# Altium PCB pci-reles.PcbDoc
Units mm, origin at the board's own origin, x right, y up, seen from the top; angles counter-clockwise.
Board outline 92.3 x 121.3 mm, 2 copper layers (Top Layer, Bottom Layer); 81 components, 54 nets, 207 pads, 0 vias.
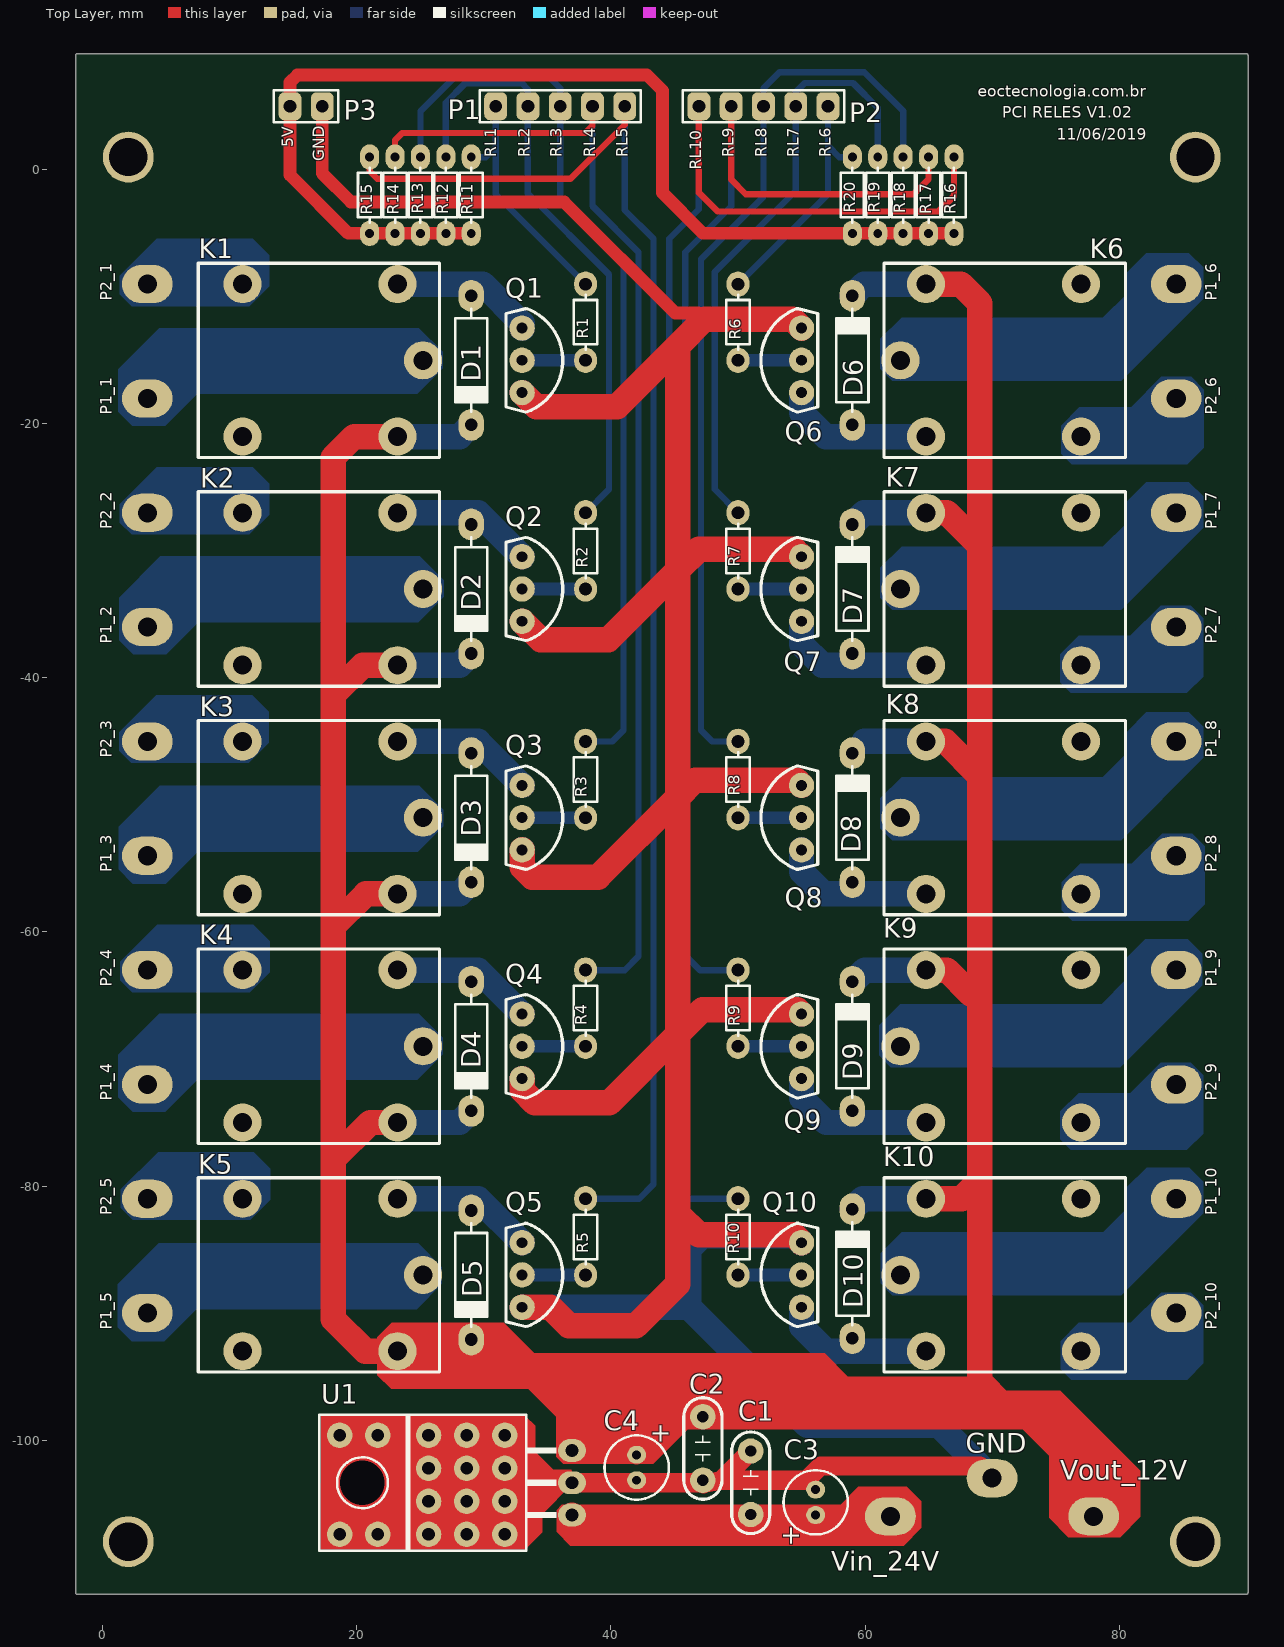
[diagram p0: Top Layer view]
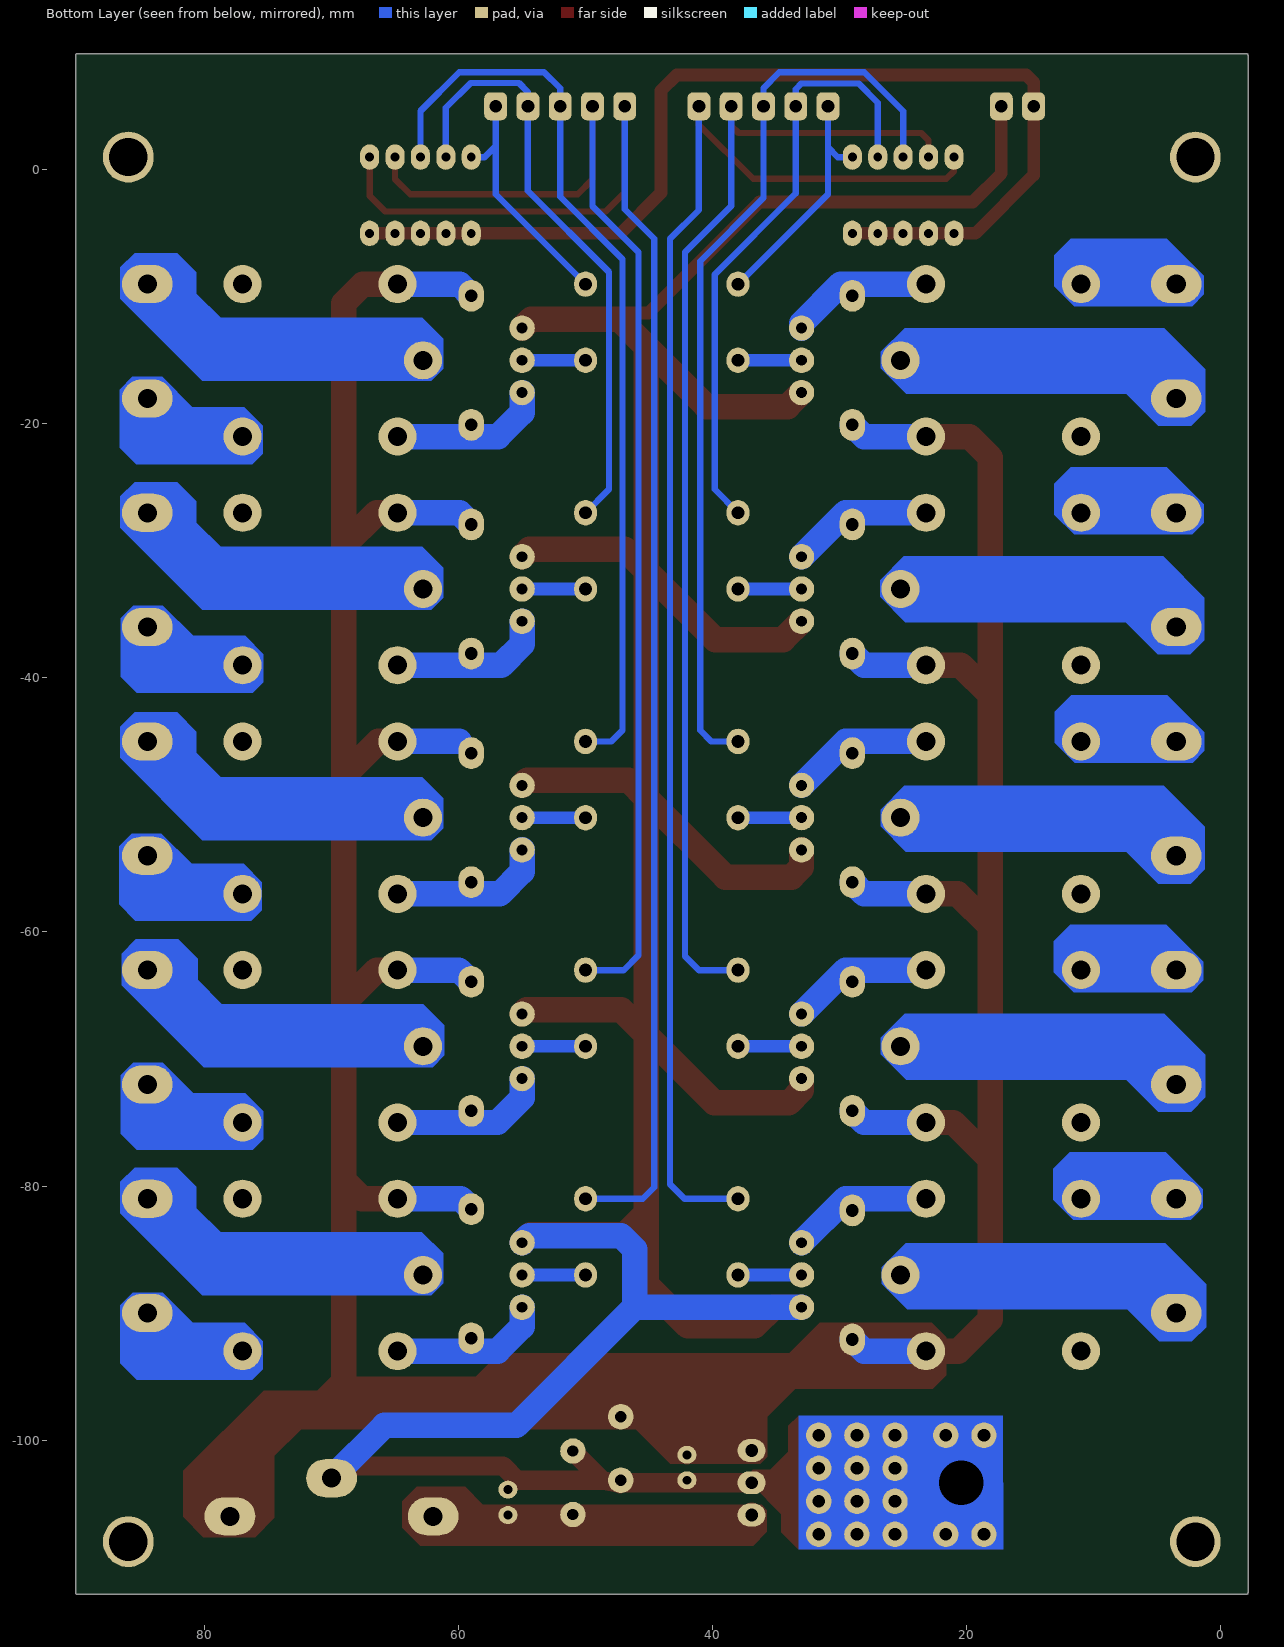
[diagram p1: Bottom Layer view, seen from below]
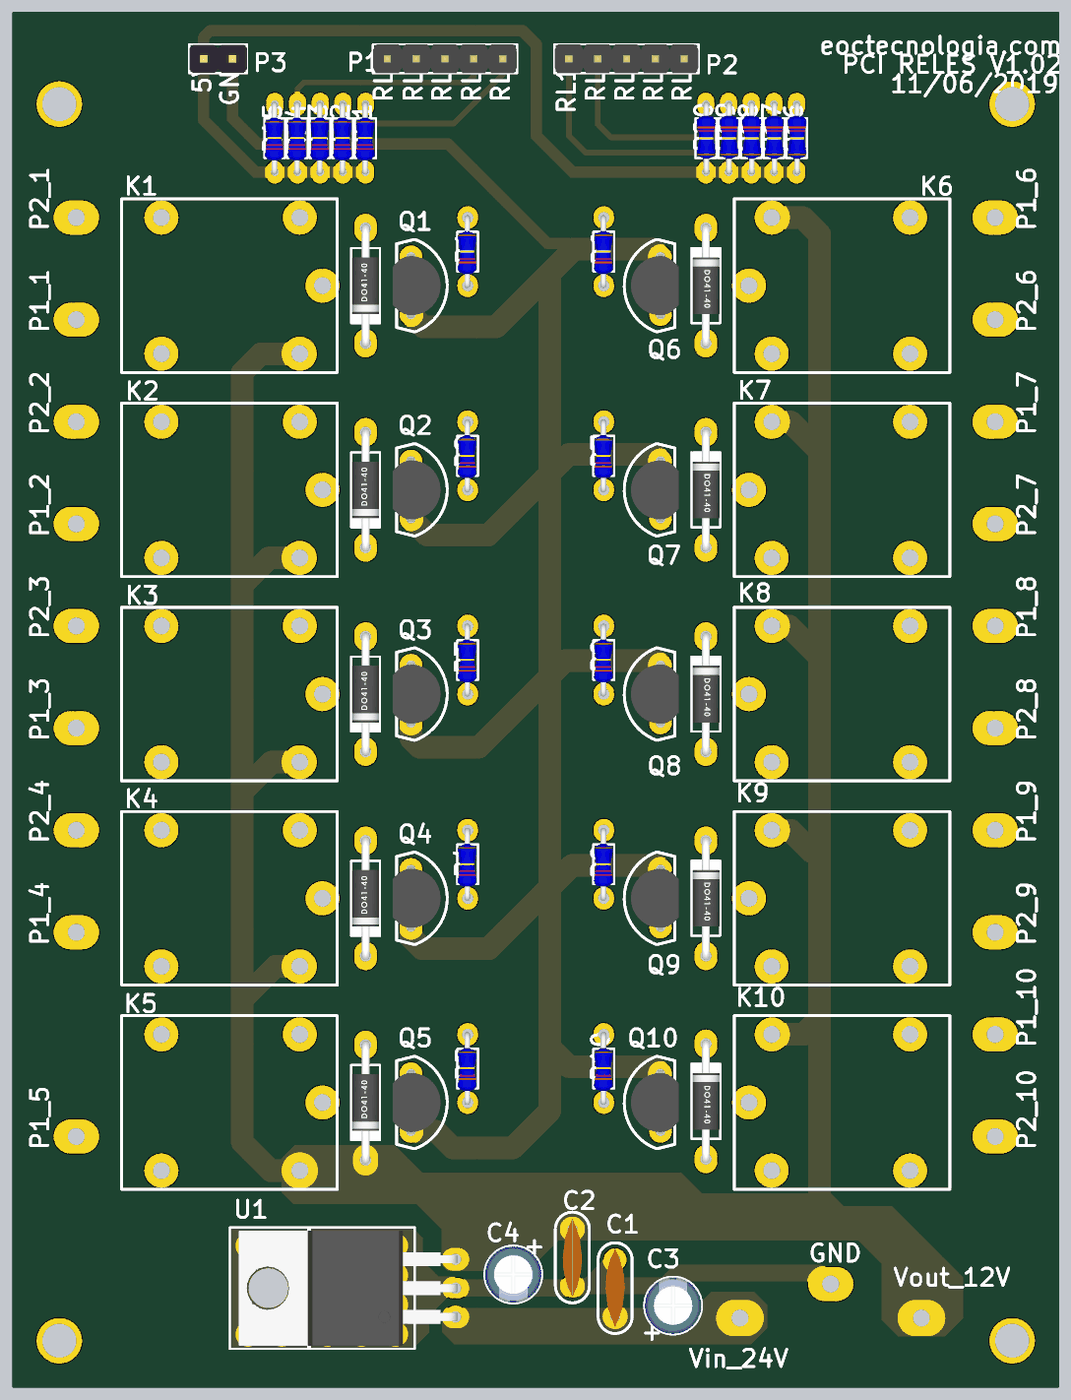
[diagram p2: 3D render of the assembled board from above, using the file's embedded part models]

## Layer stack, top to bottom
Top Solder: solder mask 0.0102, Solder Resist, Dk 3.5
Top Layer: signal copper 0.0356
Dielectric 1: dielectric 0.32, FR-4, Dk 4.8
Bottom Layer: signal copper 0.0356
Bottom Solder: solder mask 0.0102, Solder Resist, Dk 3.5

## Board outline
-2.15,-112 ccw(c-2,-112) -2,-112.15 90,-112.15 ccw(c90,-112) 90.15,-112 90.15,9 ccw(c90,9) 89.91,9.12 ccw(c89.82,9) 89.82,9.15 -2,9.15 ccw(c-2,9) -2.15,9

## Design rules (kind name [scope] priority, off if disabled: settings)
Clearance [All] p1: gap=0.254 ignorepadtopadclearanceinfootprint=FALSE except(0: Arc-Hole Track-Hole SMDPad-Hole THPad-Hole Via-Hole Fill-Hole Poly-Hole Region-Hole Text-Hole)
PolygonConnect [All] p1: connectstyle=Relief reliefconductorwidth=0.254 reliefentries=4 polygonreliefangle="90 Angle" airgapwidth=0.254
RoomDefinition placa_rele [InComponentClass('placa_rele')] p1: confinementstyle=ConfineIn formatcopy=TRUE lockcomponents=FALSE outline -1.99,9.04 -2.04,8.988 -2.04,-112.05 -2,-112.009 89.98,-112.009 89.98,8.988
RoutingVias [All] p1: holewidth=0.711 width=1.27 viastyle="Through Hole" minholewidth=0.711 minwidth=1.27 maxholewidth=0.711 maxwidth=1.27
SolderMaskExpansion [All] p1: expansion=0.102
Width [All] p1: maxlimit=3 minlimit=0.3 preferedwidth=1 minimp=50.000000 maximp=50.000000 favimp=50.000000
30 further rules are at their usual default settings.

## Components (designator, comment, footprint, x,y, rotation, side; value= is the part's Value field where it differs from the comment)
C1 "100nF 50V" "CAP CER 6 x 3 x 5" 51,-103.36 r270 top
C2 "100nF 50V" "CAP CER 6 x 3 x 5" 47.23,-100.66 r90 top
C3 "100uF 16V" "CAP ELE 5 x 11 x 2" 56.11,-104.9 r90 top
C4 "10uF 50V" "CAP ELE 5 x 11 x 2" 42.02,-102.16 r270 top
D1 "1N4007" DO-41 29,-15 r270 top
D2 "1N4007" DO-41 29,-33 r270 top
D3 "1N4007" DO-41 29,-51 r270 top
D4 "1N4007" DO-41 29,-69 r270 top
D5 "1N4007" DO-41 29,-87 r270 top
D6 "1N4007" DO-41 59,-15 r90 top
D7 "1N4007" DO-41 59,-33 r90 top
D8 "1N4007" DO-41 59,-51 r90 top
D9 "1N4007" DO-41 59,-69 r90 top
D10 "1N4007" DO-41 59,-86.9 r90 top
GND "PAD 1.5x3mm" "PAD 1.5x3mm"#1 70.58,-103.88 r0 top
K1 "AZ1RC2" "RELE SPDT" 17,-15 r180 top
K2 "AZ1RC2" "RELE SPDT" 17,-33 r180 top
K3 "AZ1RC2" "RELE SPDT" 17,-51 r180 top
K4 "AZ1RC2" "RELE SPDT" 17,-69 r180 top
K5 "AZ1RC2" "RELE SPDT" 17,-87 r180 top
K6 "AZ1RC2" "RELE SPDT" 71,-15 r0 top
K7 "AZ1RC2" "RELE SPDT" 71,-33 r0 top
K8 "AZ1RC2" "RELE SPDT" 71,-51 r0 top
K9 "AZ1RC2" "RELE SPDT" 71,-69 r0 top
K10 "AZ1RC2" "RELE SPDT" 71,-87 r0 top
P1 "Barra de Pinos RL" "HEADER 5X2.54MM" 36,5 r0 top
P1_1 "PAD 1.5x3mm" "PAD 1.5x3mm"#2 3.9,-18.23 r90 top
P1_2 "PAD 1.5x3mm" "PAD 1.5x3mm"#3 2.98,-33.8 r0 top
P1_3 "PAD 1.5x3mm" "PAD 1.5x3mm"#4 2.54,-50.63 r0 top
P1_4 "PAD 1.5x3mm" "PAD 1.5x3mm"#5 2.26,-69.61 r0 top
P1_5 "PAD 1.5x3mm" "PAD 1.5x3mm"#6 2.4,-88.31 r0 top
P1_6 "PAD 1.5x3mm" "PAD 1.5x3mm"#7 84.51,-14.39 r0 top
P1_7 "PAD 1.5x3mm" "PAD 1.5x3mm"#8 84.51,-32.65 r0 top
P1_8 "PAD 1.5x3mm" "PAD 1.5x3mm"#9 83.36,-50.63 r0 top
P1_9 "PAD 1.5x3mm" "PAD 1.5x3mm"#10 84.8,-68.6 r0 top
P1_10 "PAD 1.5x3mm" "PAD 1.5x3mm"#11 84.08,-86.87 r90 top
P2 "Barra de Pinos RL" "HEADER 5X2.54MM" 52,5 r0 top
P2_1 "PAD 1.5x3mm" "PAD 1.5x3mm"#12 3.66,-9.02 r0 top
P2_2 "PAD 1.5x3mm" "PAD 1.5x3mm"#13 1.97,-26.75 r90 top
P2_3 "PAD 1.5x3mm" "PAD 1.5x3mm"#14 -4.07,-46.74 r90 top
P2_4 "PAD 1.5x3mm" "PAD 1.5x3mm"#15 -4.5,-63.86 r90 top
P2_5 "PAD 1.5x3mm" "PAD 1.5x3mm"#16 -7.67,-81.69 r90 top
P2_6 "PAD 1.5x3mm" "PAD 1.5x3mm"#17 84.51,-21.15 r90 top
P2_7 "PAD 1.5x3mm" "PAD 1.5x3mm"#18 84.08,-38.83 r90 top
P2_8 "PAD 1.5x3mm" "PAD 1.5x3mm"#19 83.65,-56.96 r90 top
P2_9 "PAD 1.5x3mm" "PAD 1.5x3mm"#20 84.8,-75.51 r90 top
P2_10 "PAD 1.5x3mm" "PAD 1.5x3mm"#21 85.23,-93.63 r90 top
P3 "Barra de Pinos VCC/GND" "HEADER 2X2.54MM" 16,5 r180 top
Q1 "BC337" TO-92A 33,-15 r90 top
Q2 "BC337" TO-92A 33,-33 r90 top
Q3 "BC337" TO-92A 33,-51 r90 top
Q4 "BC337" TO-92A 33,-69 r90 top
Q5 "BC337" TO-92A 33,-87 r90 top
Q6 "BC337" TO-92A 55,-15 r270 top
Q7 "BC337" TO-92A 55,-33 r270 top
Q8 "BC337" TO-92A 55,-51 r270 top
Q9 "BC337" TO-92A 55,-69 r270 top
Q10 "BC337" TO-92A 55,-87 r270 top
R1 "2k2 1/8W" "RES CR16"#1 38,-12 r270 top
R2 "2k2 1/8W" "RES CR16"#1 38,-30 r270 top
R3 "2k2 1/8W" "RES CR16"#1 38,-48 r270 top
R4 "2k2 1/8W" "RES CR16"#1 38,-66 r270 top
R5 "2k2 1/8W" "RES CR16"#1 38,-84 r270 top
R6 "2k2 1/8W" "RES CR16"#1 50,-12 r270 top
R7 "2k2 1/8W" "RES CR16"#1 50,-30 r270 top
R8 "2k2 1/8W" "RES CR16"#1 50,-48 r270 top
R9 "2k2 1/8W" "RES CR16"#1 50,-66 r270 top
R10 "2k2 1/8W" "RES CR16"#1 50,-84 r270 top
R11 "10k 1/8W 1%" "RES CR16"#2 29,-2 r270 top
R12 "10k 1/8W 1%" "RES CR16"#2 27,-2 r270 top
R13 "10k 1/8W 1%" "RES CR16"#2 25,-2 r270 top
R14 "10k 1/8W 1%" "RES CR16"#2 23,-2 r270 top
R15 "10k 1/8W 1%" "RES CR16"#2 21,-2 r270 top
R16 "10k 1/8W 1%" "RES CR16"#2 67,-2 r90 top
R17 "10k 1/8W 1%" "RES CR16"#2 65,-2 r90 top
R18 "10k 1/8W 1%" "RES CR16"#2 63,-2 r90 top
R19 "10k 1/8W 1%" "RES CR16"#2 61,-2 r90 top
R20 "10k 1/8W 1%" "RES CR16"#2 59,-2 r90 top
U1 "LM7812CT" TO220_90 26.98,-103.36 r0 top
Vin_24V "PAD 1.5x3mm" "PAD 1.5x3mm"#22 62.84,-106.34 r90 top
Vout_12V "PAD 1.5x3mm" "PAD 1.5x3mm"#23 78.72,-106.27 r90 top

## Footprints (in the part's own frame and the unit in brackets; to place one, negate y for a bottom-side part, rotate by r counter-clockwise, add the part's x,y. Pads: shape width x height; smd on the part's side, far side on the other; paste and mask are expansions set on the pad)
"CAP CER 6 x 3 x 5" [mm]
  round 2 hole 0.9: 1(-2.5,0) 2(2.5,0)
  silkscreen extent -4,-1.5 4,1.5, body extent -3.5,-0.85 3.49,0.85, height 7.5
"CAP ELE 5 x 11 x 2" [mm] "Capacitor 5mm diâmetro x 11mm de altura x 2mm entre pinos"
  oval 1.4x1.5 hole 0.7: 1(-1,0) 2(1,0)
  silkscreen extent -2.53,-2.53 2.53,2.53, body extent -2.5,-2.5 2.5,2.5, height 11
DO-41 [mm]
  oval 2.5x2 hole 1: 1(-5.08,0) 2(5.08,0)
  silkscreen extent -4.06,-1.27 4.06,1.27, body extent -5.43,-1.2 5.43,1.2, height 2.53
"HEADER 2X2.54MM" [mm] "Barra de pinos, 2 pinos, espaçamento 2.54mm, Body 7.62x2.54mm"
  rrect50% 1.8x2.2 hole 1: 1(-1.27,0) 2(1.27,0)
  silkscreen extent -2.54,-1.27 2.54,1.27, body extent -2.54,-1.24 2.54,1.24, height 8.54
"HEADER 5X2.54MM" [mm] "Barra de pinos, 5 pinos, espaçamento 2.54mm, Body 12.95x2.54mm"
  rrect50% 1.8x2.2 hole 1: 1(-5.08,0) 2(-2.54,0) 3(0,0) 4(2.54,0) 5(5.08,0)
  silkscreen extent -6.35,-1.27 6.35,1.27, body extent -6.35,-1.27 6.35,1.27, height 8.54
"PAD 1.5x3mm"#1 [mm]
  oval 4x3 hole 1.5: 1(-0.58,0.88)
"PAD 1.5x3mm"#2 [mm]
  oval 3x4 hole 1.5: 1(0.23,0.4)
"PAD 1.5x3mm"#3 [mm]
  oval 4x3 hole 1.5: 1(0.52,-2.2)
"PAD 1.5x3mm"#4 [mm]
  oval 4x3 hole 1.5: 1(0.96,-3.37)
"PAD 1.5x3mm"#5 [mm]
  oval 4x3 hole 1.5: 1(1.24,-2.39)
"PAD 1.5x3mm"#6 [mm]
  oval 4x3 hole 1.5: 1(1.1,-1.69)
"PAD 1.5x3mm"#7 [mm]
  oval 4x3 hole 1.5: 1(-0.01,5.39)
"PAD 1.5x3mm"#8 [mm]
  oval 4x3 hole 1.5: 1(-0.01,5.65)
"PAD 1.5x3mm"#9 [mm]
  oval 4x3 hole 1.5: 1(1.14,5.63)
"PAD 1.5x3mm"#10 [mm]
  oval 4x3 hole 1.5: 1(-0.3,5.6)
"PAD 1.5x3mm"#11 [mm]
  oval 3x4 hole 1.5: 1(5.87,-0.42)
"PAD 1.5x3mm"#12 [mm]
  oval 4x3 hole 1.5: 1(-0.16,0.02)
"PAD 1.5x3mm"#13 [mm]
  oval 3x4 hole 1.5: 1(-0.25,-1.53)
"PAD 1.5x3mm"#14 [mm]
  oval 3x4 hole 1.5: 1(1.74,-7.57)
"PAD 1.5x3mm"#15 [mm]
  oval 3x4 hole 1.5: 1(0.86,-8)
"PAD 1.5x3mm"#16 [mm]
  oval 3x4 hole 1.5: 1(0.69,-11.17)
"PAD 1.5x3mm"#17 [mm]
  oval 3x4 hole 1.5: 1(3.15,0.01)
"PAD 1.5x3mm"#18 [mm]
  oval 3x4 hole 1.5: 1(2.83,-0.42)
"PAD 1.5x3mm"#19 [mm]
  oval 3x4 hole 1.5: 1(2.96,-0.85)
"PAD 1.5x3mm"#20 [mm]
  oval 3x4 hole 1.5: 1(3.51,0.3)
"PAD 1.5x3mm"#21 [mm]
  oval 3x4 hole 1.5: 1(3.63,0.73)
"PAD 1.5x3mm"#22 [mm]
  oval 3x4 hole 1.5: 1(0.34,0.84)
"PAD 1.5x3mm"#23 [mm]
  oval 3x4 hole 1.5: 1(0.27,0.72)
"RELE SPDT" [mm]
  round 3 hole 1.5: 1(-8.2,0) 2(6,-6) 3(6,6) 4(-6.2,6) 5(-6.2,-6)
  silkscreen extent -9.5,-7.65 9.5,7.65, body extent -9.4,-7.49 9.4,7.51, height 15.4
"RES CR16"#1 [mm]
  oval 2x1.8 hole 1: 1(-3,0) 2(3,0)
  silkscreen extent -2.15,-0.91 2.15,0.91, body extent -3.2,-0.89 3.2,0.81, height 1.71
"RES CR16"#2 [mm]
  oval 2x1.5 hole 0.7: 1(-3,0) 2(3,0)
  silkscreen extent -2.15,-0.91 2.15,0.91, body extent -3.2,-0.89 3.2,0.81, height 1.71
TO220_90 [mm]
  round 0 hole 3.5: 0(-6.55,0)
  oval 2.2x1.8 hole 1: 1(9.95,-2.54) 2(9.95,0) 3(9.95,2.54)
  silkscreen extent -9.95,-5.35 8.71,5.35, body extent -9.17,-5.08 10.11,5.08, height 4.45
TO-92A [mm]
  round 2 hole 0.85: 1(2.54,0) 2(0,0) 3(-2.54,0)
  silkscreen extent -4.06,-3.19 4.06,1.27, body extent -2.79,-2.61 2.79,1.59, height 8

## Part data
C1 C2: library part "Cap Cerâmico 100nF 50V", "CAP CER 0.1UF 50V Y5V RADIAL", Manufacturer="AVX Corporation", Manufacturer Part Number=5ZH104ZOCAM, Operating Temperature="-30°C ~ 85°C", Package / Case="Radial, Disc", Ratings=-, Supplier Part Number 1=478-4279-1-ND, Temperature Coefficient="Y5V (F)", Tolerance="-20%, +80%", Voltage - Rated=50V, Applications="General Purpose", Category=Capacitors, ComponentLink1Description=http://media.digikey.com/pdf/Data%20Sheets/AVX%20PDFs/Disc_Ceram_Cap_Class_III.pdf, ComponentLink1URL=http://media.digikey.com/pdf/Data%20Sheets/AVX%20PDFs/Disc_Ceram_Cap_Class_III.pdf, Código=50, Features=-, Height - Seated (Max)="0.118\" (3.00mm)", Lead Spacing="0.197\" (5.00mm)", Lead Style="Formed Leads - Kinked", Montagem=PTH, Mounting Type="Through Hole", Packaging="Cut Tape (CT)", Part Status=Obsolete, Pricing 1="1=0 (USD)", RoHS="RoHS Compliant", Size / Dimension="0.236\" Dia (6.00mm)", Stock 1=0, Supplier 1=Digi-Key, Thickness (Max)=-
C3: library part "Cap Eletrolitico 100uF/16V", "CAP ALUM 100UF 20% 16V RADIAL", ESR (Equivalent Series Resistance)=-, Lifetime @ Temp.="2000 Hrs @ 85°C", Manufacturer=Nichicon, Manufacturer Part Number=UFW1C101MDD1TD, Operating Temperature="-40°C ~ 85°C", Package / Case="Radial, Can", Ripple Current - High Frequency="232.5mA @ 10kHz", Ripple Current - Low Frequency="155mA @ 120Hz", Supplier Part Number 1=493-10975-1-ND, Tolerance=±20%, Applications=Audio, Category=Capacitors, ComponentLink1Description=http://nichicon-us.com/english/products/pdfs/e-ufw.pdf, ComponentLink1URL=http://nichicon-us.com/english/products/pdfs/e-ufw.pdf, Código=1311, Height - Seated (Max)="0.492\" (12.50mm)", Lead Spacing="0.079\" (2.00mm)", Montagem=PTH, Mounting Type="Through Hole", Packaging="Cut Tape (CT)", Part Status=Active, Polarization=Polar, Pricing 1="1=0.23, 10=0.159, 100=0.0903, 500=0.06376, 1000=0.05579 (USD)", RoHS="RoHS Compliant", Size / Dimension="0.197\" Dia (5.00mm)", Stock 1=17383, Supplier 1=Digi-Key, Surface Mount Land Size=-
C4: library part "Cap Eletrolitico 10uF 400V", "CAP ALUM 10UF 20% 400V RADIAL", ESR (Equivalent Series Resistance)=-, Lifetime @ Temp.="1000 Hrs @ 105°C", Manufacturer=Nichicon, Manufacturer Part Number=UVY2G100MPD, Operating Temperature="-40°C ~ 105°C", Package / Case="Radial, Can", Ripple Current - High Frequency="102.4mA @ 10kHz", Ripple Current - Low Frequency="64mA @ 120Hz", Supplier Part Number 1=493-13411-ND, Tolerance=±20%, Applications="General Purpose", Category=Capacitors, ComponentLink1Description=http://nichicon-us.com/english/products/pdfs/e-uvy.pdf, ComponentLink1URL=http://nichicon-us.com/english/products/pdfs/e-uvy.pdf, Height - Seated (Max)="0.689\" (17.50mm)", Lead Spacing="0.197\" (5.00mm)", Montagem=PTH, Mounting Type="Through Hole", Packaging=Bulk, Part Status=Active, Polarization=Polar, Pricing 1="1=0.65, 10=0.462, 100=0.3045, 500=0.22554, 1000=0.19171, 2500=0.18043, 5000=0.16916 (USD)", RoHS="RoHS Compliant", Size / Dimension="0.394\" Dia (10.00mm)", Stock 1=12533, Supplier 1=Digi-Key, Surface Mount Land Size=-
D1 D2 D3 D4 D5 D6 D7 D8 D9 D10: library part "Diodo 1N4007", "DIODE GEN PURP 1KV 1A DO41", Base Part Number=RGP30K, Capacitance @ Vr, F="8pF @ 4V, 1MHz", Current - Average Rectified (Io)=1A, Current - Reverse Leakage @ Vr="5µA @ 1000V", Manufacturer="Diodes Incorporated", Manufacturer Part Number=1N4007G-T, Operating Temperature - Junction="-65°C ~ 175°C", Package / Case="DO-204AL, DO-41, Axial", Supplier Device Package=DO-41, Supplier Part Number 1=1N4007GDICT-ND, Voltage - Forward (Vf) (Max) @ If="1V @ 1A", Category="Discrete Semiconductor Products", ComponentLink1Description=https://www.diodes.com/assets/Datasheets/ds29002.pdf, ComponentLink1URL=https://www.diodes.com/assets/Datasheets/ds29002.pdf, ComponentLink2Description=http://www.vishay.com/docs/88704/rgp30a.pdf, ComponentLink2URL=http://www.vishay.com/docs/88704/rgp30a.pdf, Código=2, Diode Type=Standard, Montagem=PTH, Mounting Type="Through Hole", Packaging="Cut Tape (CT)", Part Status=Active, Pricing 1="1=0.4, 10=0.299, 100=0.1694, 500=0.11216, 1000=0.08599 (USD)", Pricing 2="2000=0.38779 (USD)", RoHS="RoHS Compliant", Speed="Standard Recovery >500ns, > 200mA (Io)", Stock 1=46214, Stock 2=0, Supplier 1=Digi-Key, Supplier 2=Digi-Key, Supplier Part Number 2=RGP30K-E3/73-ND
GND P1_1 P1_2 P1_3 P1_4 P1_5 P1_6 P1_7 P1_8 P1_9 P1_10 P2_1 P2_2 P2_3 P2_4 P2_5 P2_6 P2_7 P2_8 P2_9 P2_10 Vin_24V Vout_12V: "PAD"
K1 K2 K3 K4 K5 K6 K7 K8 K9 K10: library part "Rele AZ1RC2", "RELAY GEN PURPOSE SPDT 10A 12V", Coil Power="360 mW", Coil Resistance="400 Ohms", Coil Voltage=12VDC, Manufacturer=Metaltex, Operating Temperature="-40°C ~ 85°C", Supplier Part Number 1=Z1012-ND, Switching Voltage="250VAC, 30VDC - Max", Turn Off Voltage (Min)="1.2 VDC", Turn On Voltage (Max)="9 VDC", Category=Relays, Coil Type="Non Latching", ComponentLink1Description=http://www.metaltex.com.br/downloads/AZ.pdf, ComponentLink1URL=http://www.metaltex.com.br/downloads/AZ.pdf, Contact Form="SPDT (1 Form C)", Contact Material="Silver Tin Oxide (AgSnO)", Código=2567, Manufacturer Part Number=AZ1RC2, Montagem=PTH, Mounting Type="Through Hole", Packaging=Tray, Part Status=Active, Pricing 1="1=1.33, 10=1.247, 25=1.108, 50=1.0526, 100=0.9972, 250=0.8864, 500=0.831 (USD)", Relay Type="General Purpose", RoHS="RoHS Compliant", Stock 1=37370, Supplier 1=Digi-Key, Termination Style="PC Pin"
P1 P2: library part "Barra de pinos simples 180°, 5 pinos", "CONN HEADER 5 POS 2.54", Current Rating=1A, Insulation Color=Black, Manufacturer=Metaltex, Manufacturer Part Number=BPSC-5, Material Flammability Rating="UL94 V-0", Operating Temperature="-40°C ~ 125°C", Supplier Part Number 1=732-5318-ND, Voltage Rating=250V, Applications=-, Category="Connectors, Interconnects", ComponentLink1Description=http://www.metaltex.com.br/produtos/componentes/4091/conectores_para_pci/4094/bp_barra_de_pinos, ComponentLink1URL=http://www.metaltex.com.br/produtos/componentes/4091/conectores_para_pci/4094/bp_barra_de_pinos, Connector Type=Header, Contact Finish - Mating=Gold, Contact Finish - Post=-, Contact Finish Thickness - Mating=-, Contact Finish Thickness - Post=-, Contact Length - Mating="0.236\" (6.00mm)", Contact Length - Post="0.118\" (3.00mm)", Contact Material="Copper Alloy", Contact Shape=Square, Contact Type="Male Pin", Código=2309, Fastening Type=-, Features=-, Ingress Protection=-, Insulation Height="0.100\" (2.54mm)", Insulation Material="Polybutylene Terephthalate (PBT)", Mated Stacking Heights=-, Montagem=PTH, Mounting Type="Through Hole", Number of Positions=5, Number of Positions Loaded=All, Number of Rows=1, Overall Contact Length="0.454\" (11.54mm)", Packaging=Bulk, Part Status=Active, Pitch - Mating="0.100\" (2.54mm)", Pricing 1="1=0.25, 10=0.209, 25=0.174, 50=0.145, 100=0.132, 1000=0.12 (USD)", RoHS="RoHS Compliant", Row Spacing - Mating=-, Shrouding=Unshrouded, Stock 1=5437, Style="Board to Board or Cable", Supplier 1=Digi-Key, Termination=Solder
P3: library part "Barra de pinos simples 180°, 2 pinos", "CONN HEADER 2 POS 2.54", Current Rating=3A, Insulation Color=Black, Manufacturer=Metaltex, Manufacturer Part Number=BPSC-2, Material Flammability Rating="UL94 V-0", Operating Temperature="-40°C ~ 125°C", Supplier Part Number 1=732-5315-ND, Voltage Rating=250V, Applications=-, Category="Connectors, Interconnects", ComponentLink1Description=http://www.metaltex.com.br/produtos/componentes/4091/conectores_para_pci/4094/bp_barra_de_pinos, ComponentLink1URL=http://www.metaltex.com.br/produtos/componentes/4091/conectores_para_pci/4094/bp_barra_de_pinos, Connector Type=Header, Contact Finish - Mating=Gold, Contact Finish - Post=-, Contact Finish Thickness - Mating=-, Contact Finish Thickness - Post=-, Contact Length - Mating="0.236\" (6.00mm)", Contact Length - Post="0.118\" (3.00mm)", Contact Material="Copper Alloy", Contact Shape=Square, Contact Type="Male Pin", Código=2306, Fastening Type=Push-Pull, Features=-, Ingress Protection=-, Insulation Height="0.100\" (2.54mm)", Insulation Material="Polybutylene Terephthalate (PBT)", Mated Stacking Heights=-, Montagem=PTH, Mounting Type="Through Hole", Number of Positions=2, Number of Positions Loaded=All, Number of Rows=1, Overall Contact Length="0.454\" (11.54mm)", Packaging=Bulk, Part Status=Active, Pitch - Mating="0.100\" (2.54mm)", Pricing 1="1=0.18, 10=0.153, 25=0.1272, 50=0.106, 100=0.096, 1000=0.088 (USD)", RoHS="RoHS Compliant", Row Spacing - Mating=-, Shrouding=Unshrouded, Stock 1=2640, Style="Board to Board or Cable", Supplier 1=Digi-Key, Termination=Solder
Q1 Q2 Q3 Q4 Q5 Q6 Q7 Q8 Q9 Q10: library part "Transistor NPN BC337-40", "TRANS NPN 45V 0.8A TO-92", Current - Collector Cutoff (Max)=100nA, DC Current Gain (hFE) (Min) @ Ic, Vce="250 @ 100mA, 1V", Frequency - Transition=100MHz, Manufacturer="ON Semiconductor", Manufacturer Part Number=BC33740TA, Operating Temperature="150°C (TJ)", Package / Case="TO-226-3, TO-92-3 (TO-226AA) (Formed Leads)", Supplier Device Package=TO-92-3, Supplier Part Number 1=BC33740TACT-ND, Category="Discrete Semiconductor Products", ComponentLink1Description=https://www.fairchildsemi.com/datasheets/BC/BC337.pdf, ComponentLink1URL=https://www.fairchildsemi.com/datasheets/BC/BC337.pdf, Código=1679, Montagem=PTH, Mounting Type="Through Hole", Packaging="Cut Tape (CT)", Part Status=Active, Pricing 1="1=0.23, 10=0.19, 100=0.1005, 500=0.06612, 1000=0.04496 (USD)", RoHS="RoHS Compliant", Stock 1=25859, Supplier 1=Digi-Key, Transistor Type=NPN, Vce Saturation (Max) @ Ib, Ic="700mV @ 50mA, 500mA"
R1 R2 R3 R4 R5 R6 R7 R8 R9 R10: library part "Res 2k2 1/8W 5% CR16", "RES 2K2 OHM 1/8W 5% AXIAL", Manufacturer="Stackpole Electronics Inc.", Manufacturer Part Number=CF18JT2K20, Operating Temperature="-55°C ~ 155°C", Package / Case=Axial, Power (Watts)="0.125W, 1/8W", Supplier Part Number 1=CF18JT2K20CT-ND, Temperature Coefficient="0/ -400ppm/°C", Tolerance=±5%, Category=Resistors, ComponentLink1Description=https://www.seielect.com/Catalog/SEI-CF_CFM.pdf, ComponentLink1URL=https://www.seielect.com/Catalog/SEI-CF_CFM.pdf, Composition="Carbon Film", Código=403, Failure Rate=-, Features="Flame Retardant Coating, Safety", Height - Seated (Max)=-, Montagem=PTH, Packaging="Cut Tape (CT)", Part Status=Active, Pricing 1="1=0.1, 10=0.049, 25=0.036, 50=0.0272, 100=0.0201, 250=0.01536, 500=0.01228, 1000=0.00904 (USD)", RoHS="RoHS Compliant", Size / Dimension="0.067\" Dia x 0.130\" L (1.70mm x 3.30mm)", Stock 1=184779, Supplier 1=Digi-Key, Supplier Device Package=Axial
R11 R12 R13 R14 R15 R16 R17 R18 R19 R20: library part "Res 10k 1/8W 1% CR16", "RES 10K OHM 1/8W 1% AXIAL", Manufacturer="Stackpole Electronics Inc.", Manufacturer Part Number=RNF18FTD10K0, Operating Temperature="-55°C ~ 155°C", Package / Case=Axial, Power (Watts)="0.125W, 1/8W", Supplier Part Number 1=RNF18FTD10K0CT-ND, Temperature Coefficient=±100ppm/°C, Tolerance=±1%, Category=Resistors, ComponentLink1Description=https://www.seielect.com/Catalog/SEI-RNF_RNMF.pdf, ComponentLink1URL=https://www.seielect.com/Catalog/SEI-RNF_RNMF.pdf, Composition="Metal Film", Código=1472, Failure Rate=-, Features="Flame Retardant Coating, Safety", Height - Seated (Max)=-, Montagem=PTH, Packaging="Cut Tape (CT)", Part Status=Active, Pricing 1="1=0.1, 10=0.072, 25=0.0496, 50=0.0386, 100=0.0275, 250=0.02144, 500=0.01706, 1000=0.0121 (USD)", RoHS="RoHS Compliant", Size / Dimension="0.071\" Dia x 0.130\" L (1.80mm x 3.30mm)", Stock 1=272706, Supplier 1=Digi-Key, Supplier Device Package=Axial
U1: library part "Regulador de tensão LM7805CT", "IC REG LINEAR 5V 1A TO220-3", Current - Output=1A, Manufacturer="Texas Instruments", Manufacturer Part Number=LM7805CT/NOPB, Operating Temperature="0°C ~ 125°C", Package / Case=TO-220-3, Supplier Part Number 1=296-47192-ND, Voltage - Input (Max)=35V, Voltage - Output (Max)=-, Voltage - Output (Min/Fixed)=5V, Voltage Dropout (Max)="2V @ 1A", Category="Integrated Circuits (ICs)", ComponentLink1Description=http://www.ti.com/lit/ds/symlink/lm340.pdf, ComponentLink1URL=http://www.ti.com/lit/ds/symlink/lm340.pdf, Control Features=-, Código=329, Montagem=PTH, Mounting Type="Through Hole", Output Configuration=Positive, Output Type=Fixed, Packaging=Tube, Part Status=Active, Pricing 1="1=1.54, 10=1.381, 100=1.1097, 500=0.91176, 1000=0.75545 (USD)", Protection Features="Over Current, Over Temperature, Short Circuit", PSRR="80dB (120Hz)", RoHS="RoHS Compliant", Stock 1=304, Supplier 1=Digi-Key, Supplier Device Package=TO-220-3

## Free pads (board coordinates)
  round 4 hole 3: 0(2,-108) 0(2,1) 0(86,-108) 0(86,1)
  round 2 hole 1: 2(18.64,-107.42) 2(18.64,-99.62) 2(21.64,-107.42) 2(21.64,-99.62) 2(25.64,-107.42) 2(25.64,-104.82) 2(25.64,-102.22) 2(25.64,-99.62) 2(28.64,-107.42) 2(28.64,-104.82) 2(28.64,-102.22) 2(28.64,-99.62) 2(31.64,-107.42) 2(31.64,-104.82) 2(31.64,-102.22) 2(31.64,-99.62)

## Nets (pads, with @x,y where several pads share a name; then routed paths per layer and width w, separated by ;. In a path a pad name is that pad's centre, name@x,y a point inside that pad or via, vN(x,y) a via of type N, cw(c..) or ccw(c..) an arc to the next point about the centre after c; other vN are vias at no path point)
5V: P3.2 R11.2 R12.2 R13.2 R14.2 R15.2 R16.1 R17.1 R18.1 R19.1 R20.1 | length 85.9
  Top Layer w1: R11.2 R12.2 R13.2 R14.2 R15.2 19.32,-5 14.73,-0.41 P3.2 14.73,6.89 15.31,7.47 42.82,7.47 44.06,6.23 44.06,-1.81 47.25,-5 R20.1 R19.1 R18.1 R17.1 R16.1
12V: C2.2 C4.1 D1.2 D2.2 D3.2 D4.2 D5.2 D6.2 D7.2 D8.2 D9.2 D10.2 K1.4 K2.4 K3.4 K4.4 K5.4 K6.4 K7.4 K8.4 K9.4 K10.4 U1.3 Vout_12V.1 | length 342.3
  Top Layer w1.5: C4.1 42.02,-100.44 44.3,-98.16
  Top Layer w2: K4.4 21.05,-75 18.13,-77.92 ; K3.4 20.7,-57 18.13,-59.57 ; K2.4 20.47,-39 18.13,-41.34 ; K1.4 19.78,-21 18.13,-22.65 18.13,-41.34 ; U1.3 36.93,-99.34 ; K10.4 67.61,-81 69.03,-79.58 ; K9.4 66.44,-63 68.35,-64.91 69.03,-64.91 ; K8.4 66.32,-45 69.03,-47.71 ; K7.4 66.44,-27 69.03,-29.59 ; K6.4 67.53,-9 69.03,-10.5 69.03,-29.59 ; Vout_12V.1 78,-101.04 74.13,-97.17 70.79,-97.17 69.03,-95.41 ; 18.13,-77.92 18.13,-90.48 20.65,-93 K5.4 29.38,-93 31.28,-94.9 35.32,-94.9 36.93,-96.51 36.93,-99.34 ; 18.13,-77.92 18.13,-59.57 ; 18.13,-59.57 18.13,-41.34 ; 36.93,-99.34 38.11,-98.16 44.3,-98.16 C2.2 66.28,-98.16 69.03,-95.41 ; 69.03,-95.41 69.03,-79.58 ; 69.03,-79.58 69.03,-64.91 ; 69.03,-64.91 69.03,-47.71 ; 69.03,-47.71 69.03,-29.59
  Bottom Layer w2: K5.4 28.08,-93 D5.2 ; K4.4 28.08,-75 D4.2 ; K3.4 28.08,-57 D3.2 ; K2.4 28.08,-39 D2.2 ; K1.4 28.08,-21 D1.2 ; D10.2 59.82,-81 K10.4 ; D7.2 59.92,-27 K7.4 ; D6.2 59.92,-9 K6.4 ; D9.2@59.03,-63.95 59.98,-63 K9.4 ; 59.94,-45 K8.4
24V: C1.2 C3.1 U1.1 Vin_24V.1 | length 26
  Top Layer w2: U1.1 36.93,-106.43 37.25,-106.75 61.25,-106.75 Vin_24V.1
GND: C1.1 C2.1 C3.2 C4.2 GND.1 P3.1 pad.2 Q1.3 Q2.3 Q3.3 Q4.3 Q5.3 Q6.3 Q7.3 Q8.3 Q9.3 Q10.3 U1.2 | length 338.4
  Top Layer w1: P3.1 17.27,-0.28 19.52,-2.53 36.31,-2.53 45.06,-11.28 46.89,-11.28 47.37,-11.76
  Top Layer w1.5: U1.2 C2.1@46.884,-103.36 ; C2.1@46.579,-103.3 C2.1@46.884,-103.36 ; C2.1 47.03,-103.36 C2.1@46.884,-103.36 ; C1.1 48.7,-103.16 ; GND.1 69.03,-102.03 56.5,-102.03 55.37,-103.16 48.7,-103.16 ; C2.1@46.884,-103.36 47.179,-103.418 47.285,-103.439 48.7,-103.16
  Top Layer w2: Q5.3 35.23,-89.54 36.69,-91 41.97,-91 45.24,-87.73 45.24,-82.16 ; Q4.3 33,-72.45 34,-73.45 39.86,-73.45 45.24,-68.07 ; Q3.3 33,-54.9 33.78,-55.68 38.99,-55.68 45.24,-49.43 ; Q2.3 34.45,-36.99 39.8,-36.99 45.24,-31.55 ; Q1.3 34.1,-18.64 40.49,-18.64 45.24,-13.89 ; Q10.3 54.37,-83.83 46.91,-83.83 45.24,-82.16 ; Q9.3 54.65,-66.11 47.2,-66.11 45.24,-68.07 ; Q8.3 54.59,-48.05 46.62,-48.05 45.24,-49.43 ; Q7.3 54.42,-29.88 46.91,-29.88 45.24,-31.55 ; Q6.3 54.3,-11.76 47.37,-11.76 45.24,-13.89 ; 45.24,-82.16 45.24,-68.07 ; 45.24,-68.07 45.24,-49.43 ; 45.24,-49.43 45.24,-31.55 ; 45.24,-31.55 45.24,-13.89
  Bottom Layer w2: Q5.3 46.14,-89.54 ; Q10.3 54.44,-83.9 47.21,-83.9 46.14,-84.97 46.14,-89.54 ; GND.1 65.84,-98.84 55.44,-98.84 46.14,-89.54
NetD1_1: D1.1 K1.5 Q1.1 | length 11.4
  Bottom Layer w2: K1.5 29.91,-9 33,-12.09 Q1.1
NetD2_1: D2.1 K2.5 Q2.1 | length 11.2
  Bottom Layer w2: K2.5 29.54,-27 Q2.1
NetD3_1: D3.1 K3.5 Q3.1 | length 11.2
  Bottom Layer w2: K3.5 29.54,-45 Q3.1
NetD4_1: D4.1 K4.5 Q4.1 | length 11.2
  Bottom Layer w2: K4.5 29.54,-63 Q4.1
NetD5_1: D5.1 K5.5 Q5.1 | length 11.2
  Bottom Layer w2: K5.5 29.54,-81 Q5.1
NetD6_1: D6.1 K6.5 Q6.1 | length 12.2
  Bottom Layer w2: Q6.1 55,-19.11 56.89,-21 K6.5
NetD7_1: D7.1 K7.5 Q7.1 | length 12.3
  Bottom Layer w2: Q7.1 55,-37.36 56.64,-39 K7.5
NetD8_1: D8.1 K8.5 Q8.1 | length 12.2
  Bottom Layer w2: Q8.1 55,-55.25 56.75,-57 K8.5
NetD9_1: D9.1 K9.5 Q9.1 | length 12.1
  Bottom Layer w2: Q9.1 55,-73.07 56.93,-75 K9.5
NetD10_1: D10.1 K10.5 Q10.1 | length 12.1
  Bottom Layer w2: Q10.1 55,-91.07 56.93,-93 K10.5
NetK1_1: K1.1 P1_1.1 | length 23.5
  Bottom Layer w2: P1_1.1 3.5,-16.99 5.49,-15 K1.1
NetK1_2: K1.2 P2_1.1 | length 7.5
  Bottom Layer w2: P2_1.1 K1.2
NetK2_1: K2.1 P1_2.1 | length 22.9
  Bottom Layer w2: P1_2.1 6.5,-33 K2.1
NetK2_2: K2.2 P2_2.1 | length 7.5
  Bottom Layer w2: P2_2.1 K2.2
NetK3_1: K3.1 P1_3.1 | length 22.9
  Bottom Layer w2: P1_3.1 6.5,-51 K3.1
NetK3_2: K3.2 P2_3.1 | length 7.5
  Bottom Layer w2: P2_3.1 K3.2
NetK4_1: K4.1 P1_4.1 | length 22.9
  Bottom Layer w2: P1_4.1 6.5,-69 K4.1
NetK4_2: K4.2 P2_4.1 | length 7.5
  Bottom Layer w2: P2_4.1 K4.2
NetK5_1: K5.1 P1_5.1 | length 22.9
  Bottom Layer w2: P1_5.1 6.5,-87 K5.1
NetK5_2: K5.2 P2_5.1 | length 7.5
  Bottom Layer w2: P2_5.1 K5.2
NetK6_1: K6.1 P1_6.1 | length 24.2
  Bottom Layer w2: K6.1 78.5,-15 P1_6.1
NetK6_2: K6.2 P2_6.1 | length 10
  Bottom Layer w2: K6.2 83.66,-21 84.5,-20.16 P2_6.1
NetK7_1: K7.1 P1_7.1 | length 24.2
  Bottom Layer w2: K7.1 78.5,-33 P1_7.1
NetK7_2: K7.2 P2_7.1 | length 10
  Bottom Layer w2: K7.2 83.64,-39 84.5,-38.14 P2_7.1
NetK8_1: K8.1 P1_8.1 | length 24.2
  Bottom Layer w2: K8.1 78.5,-51 P1_8.1
NetK8_2: K8.2 P2_8.1 | length 9.9
  Bottom Layer w2: K8.2 83.55,-57 84.5,-56.05 P2_8.1
NetK9_1: K9.1 P1_9.1 | length 24.2
  Bottom Layer w2: K9.1 78.5,-69 P1_9.1
NetK9_2: K9.2 P2_9.1 | length 9.9
  Bottom Layer w2: K9.2 83.42,-75 84.5,-73.92 P2_9.1
NetK10_1: K10.1 P1_10.1 | length 24.2
  Bottom Layer w2: K10.1 78.5,-87 P1_10.1
NetK10_2: K10.2 P2_10.1 | length 10
  Bottom Layer w2: K10.2 83.57,-93 84.5,-92.07 P2_10.1
NetQ1_2: Q1.2 R1.2 | length 5
  Bottom Layer w1: Q1.2 R1.2
NetQ2_2: Q2.2 R2.2 | length 5
  Bottom Layer w1: Q2.2 R2.2
NetQ3_2: Q3.2 R3.2 | length 5
  Bottom Layer w1: Q3.2 R3.2
NetQ4_2: Q4.2 R4.2 | length 5
  Bottom Layer w1: Q4.2 R4.2
NetQ5_2: Q5.2 R5.2 | length 5
  Bottom Layer w1: Q5.2 R5.2
NetQ6_2: Q6.2 R6.2 | length 5
  Bottom Layer w1: R6.2 Q6.2
NetQ7_2: Q7.2 R7.2 | length 5
  Bottom Layer w1: R7.2 Q7.2
NetQ8_2: Q8.2 R8.2 | length 5
  Bottom Layer w1: R8.2 Q8.2
NetQ9_2: Q9.2 R9.2 | length 5
  Bottom Layer w1: R9.2 Q9.2
NetQ10_2: Q10.2 R10.2 | length 5
  Bottom Layer w1: R10.2 Q10.2
RL1: P1.1 R1.1 R11.1 | length 19.2
  Bottom Layer w0.5: R11.1 30.15,1 30.92,1.77 ; P1.1 30.92,1.77 ; R1.1 30.92,-1.92 30.92,1.77
RL2: P1.2 R2.1 R12.1 | length 48.3
  Bottom Layer w0.5: R12.1 27,5.28 28.51,6.79 33.01,6.79 33.46,6.34 P1.2 33.46,-1.86 39.84,-8.24 39.84,-25.16 R2.1
RL3: P1.3 R3.1 R13.1 | length 72.4
  Bottom Layer w0.5: R13.1 25,4.61 28.07,7.68 34.75,7.68 36,6.43 P1.3 36,-2.21 40.98,-7.19 40.98,-44.13 40.11,-45 R3.1
RL4: P1.4 R4.1 R14.1 | length 91.9
  Top Layer w0.5: R14.1 23,2.33 23.57,2.9 37.96,2.9 38.54,3.48 P1.4
  Bottom Layer w0.5: R4.1 41.07,-63 42.17,-61.9 42.17,-6.48 38.54,-2.85 P1.4
RL5: P1.5 R5.1 R15.1 | length 116.3
  Top Layer w0.5: R15.1 21,-0.11 21.6,-0.71 36.81,-0.71 41.08,3.56 P1.5
  Bottom Layer w0.5: R5.1 42.21,-81 43.35,-79.86 43.35,-5.44 41.08,-3.17 P1.5
RL6: P2.5 R6.1 R20.2 | length 19.2
  Bottom Layer w0.5: R6.1 57.08,-1.92 57.08,1.88 ; P2.5 57.08,1.88 ; R20.2 57.96,1 57.08,1.88
RL7: P2.4 R7.1 R19.2 | length 48
  Bottom Layer w0.5: R7.1 48.16,-25.16 48.16,-8.04 54.54,-1.66 P2.4 54.54,6.13 55.24,6.83 59.05,6.83 61,4.88 R19.2
RL8: P2.3 R8.1 R18.2 | length 72.3
  Bottom Layer w0.5: R8.1 47.97,-45 47.09,-44.12 47.09,-7.03 52,-2.12 P2.3 52,6.42 53.27,7.69 59.94,7.69 63,4.63 R18.2
RL9: P2.2 R9.1 R17.2 | length 97
  Top Layer w0.5: P2.2 49.46,-0.76 50.62,-1.92 63.81,-1.92 65,-0.73 R17.2
  Bottom Layer w0.5: P2.2 49.46,-2.88 45.84,-6.5 45.84,-61.83 47.01,-63 R9.1
RL10: P2.1 R10.1 R16.2 | length 122.9
  Top Layer w0.5: P2.1 46.92,-1.79 48.41,-3.28 65.78,-3.28 67,-2.06 R16.2
  Bottom Layer w0.5: P2.1 46.92,-3.1 44.59,-5.43 44.59,-80.1 45.49,-81 R10.1
pads on no net: K1.3 K2.3 K3.3 K4.3 K5.3 K6.3 K7.3 K8.3 K9.3 K10.3 U1.0

## Other copper
Top Layer:
  region net GND: 17.18,-98.09 17.21,-98.12 33.26,-98.12 33.26,-108.6 17.15,-108.6
  region net 12V: 23.2,-93 21.61,-93 21.61,-94.89 22.69,-95.97 33.5,-95.97 35.7,-98.17 35.7,-101.3 36.26,-101.86 43.34,-101.86 46.05,-99.15 72.4,-99.15 74.49,-101.24 74.49,-106.12 76,-107.63 80.08,-107.63 81.67,-106.04 81.67,-102.43 75.35,-96.11 71.13,-96.11 70.02,-95 58.64,-95 56.81,-93.17 33.97,-93.17 31.55,-90.75 22.76,-90.75 21.61,-91.9 21.61,-93
  region net GND: 36.93,-102.42 36.86,-102.35 35.45,-102.35 34.03,-100.93 34.03,-98.89 33.26,-98.12 33.26,-108.6 34.59,-107.27 34.59,-105.82 36.93,-103.48
  region net 24V: 35.72,-105.51 35.72,-107.22 36.8,-108.3 63.03,-108.3 64.42,-106.91 64.42,-104.82 63.29,-103.69 59.48,-103.69 58.08,-105.09 36.14,-105.09
Bottom Layer:
  region net GND: 17.15,-98.07 17.18,-98.1 33.23,-98.1 33.23,-108.58 17.12,-108.58
  region net NetK5_1: 26.695,-86.4 24.815,-84.52 4.385,-84.52 1.155,-87.75 1.155,-91.1 2.275,-92.22 4.845,-92.22 7.365,-89.7 24.695,-89.7 26.695,-87.7
  region net NetK4_1: 26.76,-68.32 24.88,-66.44 4.45,-66.44 1.22,-69.67 1.22,-73.02 2.34,-74.14 4.91,-74.14 7.43,-71.62 24.76,-71.62 26.76,-69.62
  region net NetK3_1: 26.78,-50.37 24.9,-48.49 4.47,-48.49 1.24,-51.72 1.24,-55.07 2.36,-56.19 4.93,-56.19 7.45,-53.67 24.78,-53.67 26.78,-51.67
  region net NetK2_1: 26.82,-32.32 24.94,-30.44 4.51,-30.44 1.28,-33.67 1.28,-37.02 2.4,-38.14 4.97,-38.14 7.49,-35.62 24.82,-35.62 26.82,-33.62
  region net NetK1_1: 26.75,-14.34 24.87,-12.46 4.44,-12.46 1.21,-15.69 1.21,-19.04 2.33,-20.16 4.9,-20.16 7.42,-17.64 24.75,-17.64 26.75,-15.64
  region net NetK5_2: 3.41,-82.65 11.62,-82.65 13.18,-81.09 13.18,-78.65 11.88,-77.35 4.34,-77.35 1.42,-80.27 1.42,-81.72 2.35,-82.65
  region net NetK4_2: 3.36,-64.73 11.57,-64.73 13.13,-63.17 13.13,-60.73 11.83,-59.43 4.29,-59.43 1.37,-62.35 1.37,-63.8 2.3,-64.73
  region net NetK3_2: 3.28,-46.67 11.49,-46.67 13.05,-45.11 13.05,-42.67 11.75,-41.37 4.21,-41.37 1.29,-44.29 1.29,-45.74 2.22,-46.67
  region net NetK2_2: 3.32,-28.7 11.53,-28.7 13.09,-27.14 13.09,-24.7 11.79,-23.4 4.25,-23.4 1.33,-26.32 1.33,-27.77 2.26,-28.7
  region net NetK1_2: 3.32,-10.73 11.53,-10.73 13.09,-9.17 13.09,-6.73 11.79,-5.43 4.25,-5.43 1.33,-8.35 1.33,-9.8 2.26,-10.73
  region net NetK10_1: 61.22,-87.04 61.22,-87.67 62.15,-88.6 80.18,-88.6 86.64,-82.14 86.64,-79.68 85.51,-78.55 82.16,-78.55 80.65,-80.06 80.65,-81.74 78.74,-83.65 62.88,-83.65 61.22,-85.31
  region net NetK9_1: 61.11,-69.08 61.11,-69.71 62.04,-70.64 80.07,-70.64 86.53,-64.18 86.53,-61.72 85.4,-60.59 82.05,-60.59 80.54,-62.1 80.54,-63.78 78.63,-65.69 62.77,-65.69 61.11,-67.35
  region net NetK8_1: 61.21,-51.2 61.21,-51.83 62.14,-52.76 80.17,-52.76 86.63,-46.3 86.63,-43.84 85.5,-42.71 82.15,-42.71 80.64,-44.22 80.64,-45.9 78.73,-47.81 62.87,-47.81 61.21,-49.47
  region net NetK7_1: 61.21,-33.07 61.21,-33.7 62.14,-34.63 80.17,-34.63 86.63,-28.17 86.63,-25.71 85.5,-24.58 82.15,-24.58 80.64,-26.09 80.64,-27.77 78.73,-29.68 62.87,-29.68 61.21,-31.34
  region net NetK6_1: 61.21,-15.04 61.21,-15.67 62.14,-16.6 80.17,-16.6 86.63,-10.14 86.63,-7.68 85.5,-6.55 82.15,-6.55 80.64,-8.06 80.64,-9.74 78.73,-11.65 62.87,-11.65 61.21,-13.31
  region net NetK10_2: 76.99,-90.77 80.92,-90.77 83.3,-88.39 85.65,-88.39 86.64,-89.38 86.64,-93.96 85.35,-95.25 76.23,-95.25 75.4,-94.42 75.4,-92.21 76.84,-90.77
  region net NetK9_2: 76.96,-72.68 80.89,-72.68 83.27,-70.3 85.62,-70.3 86.61,-71.29 86.61,-75.87 85.32,-77.16 76.2,-77.16 75.37,-76.33 75.37,-74.12 76.81,-72.68
  region net NetK8_2: 77.08,-54.64 81.01,-54.64 83.39,-52.26 85.74,-52.26 86.73,-53.25 86.73,-57.83 85.44,-59.12 76.32,-59.12 75.49,-58.29 75.49,-56.08 76.93,-54.64
  region net NetK7_2: 76.96,-36.7 80.89,-36.7 83.27,-34.32 85.62,-34.32 86.61,-35.31 86.61,-39.89 85.32,-41.18 76.2,-41.18 75.37,-40.35 75.37,-38.14 76.81,-36.7
  region net NetK6_2: 77.02,-18.69 80.95,-18.69 83.33,-16.31 85.68,-16.31 86.67,-17.3 86.67,-21.88 85.38,-23.17 76.26,-23.17 75.43,-22.34 75.43,-20.13 76.87,-18.69

## Silkscreen, mask and mechanical layers (free items; w line width, h text height)
Top Overlay:
  text "eoctecnologia.com.br" at 68.87,5.45 h1.52
  text "PCI RELES V1.02" at 70.81,3.78 h1.52
  text "11/06/2019" at 75.11,2.07 h1.52
  text "5V" at 15.31,1.79 h1.52 r90
  text "RL1" at 31.3,1 h1.52 r90
  text "RL2" at 33.92,1 h1.52 r90
  text "RL3" at 36.45,1 h1.52 r90
  text "RL4" at 39.07,1 h1.52 r90
  text "RL5" at 41.62,1 h1.52 r90
  text "RL9" at 49.99,1 h1.52 r90
  text "RL8" at 52.57,1 h1.52 r90
  text "RL7" at 55.1,1 h1.52 r90
  text "RL6" at 57.63,1 h1.52 r90
  text "GND" at 17.74,0.67 h1.52 r90
  text "RL10" at 47.42,0 h1.52 r90
Bottom Solder:
  drawing of 21 lines, arcs and shapes, not listed
Mechanical 1:
  lines w0.3: 89.82,9 -2,9 -2,-112 90,-112 90,9

## Text inside footprints (layer, text, board x,y; h text height)
C3: Top Overlay "+" at 54.831,-108.415 h1.5 r90
C4: Top Overlay "+" at 43.299,-98.645 h1.5 r270